# Altium PCB 7797-20-0224.PcbDoc (part 2 of 2)
Units mil, origin at the board's own origin, x right, y up, seen from the top; angles counter-clockwise.
Board outline 1500 x 3000 mil, 6 copper layers (Top Layer, GND, NS, EW, PWR, Bottom Layer), stack 48.468 mil thick; 119 components, 95 nets, 430 pads, 191 vias.
Unrouted connection lines stored in the file: 5.
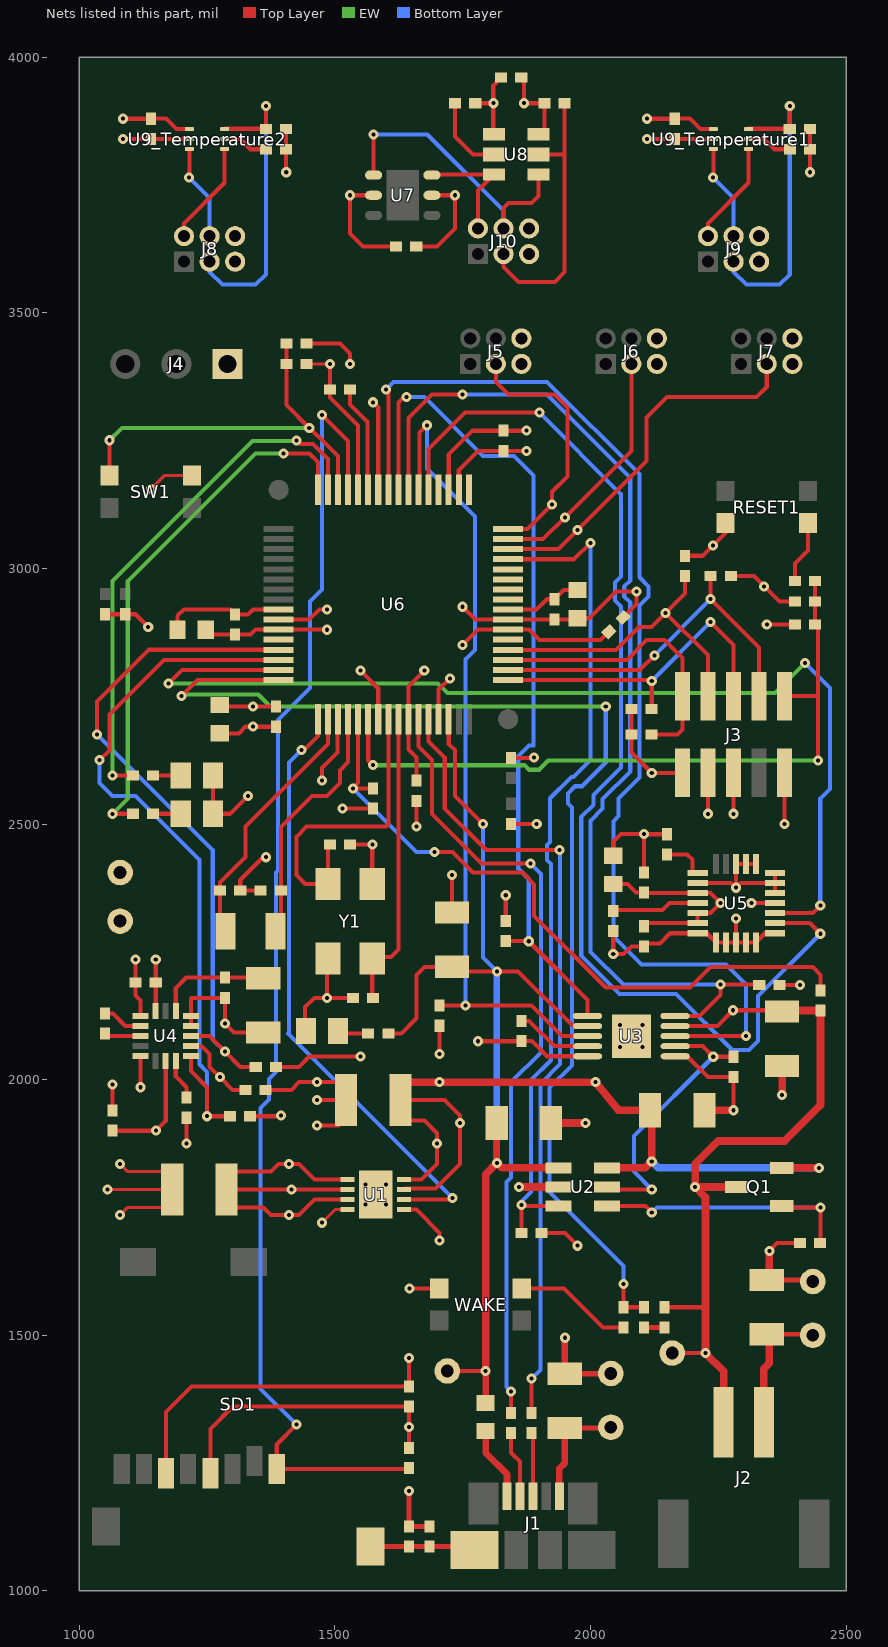
[diagram p6: the nets of this part, all layers, seen from the top]

## Via types
v1: diameter 19.68, hole 7.87, Top Layer to Bottom Layer, 191 vias

## Nets (pads, with @x,y where several pads share a name; then routed paths per layer and width w, separated by ;. In a path a pad name is that pad's centre, name@x,y a point inside that pad or via, vN(x,y) a via of type N, cw(c..) or ccw(c..) an arc to the next point about the centre after c; other vN are vias at no path point) (continued)
C4/sIO_IND1: R22.2 U6.16 | length 1044.5
  Top Layer w8: v1(1065,2520) R22.2@1105.31,2520 ; v1(1400,3225) 1450,3225 1466.89,3208.11 U6.16@1466.89,3153.82
  EW w8: v1(1065,2520) 1095,2550 1095,2975 1345,3225 v1(1400,3225)
C5/sIO_IND2: R24.2 U6.15 | length 1030.8
  Top Layer w8: v1(1065,2595) R24.2@1105.31,2595 ; v1(1425,3250) 1432,3243 1457.46,3243 1486.57,3213.88 U6.15@1486.57,3153.82
  EW w8: v1(1065,2595) 1065,2975 1338.84,3248.84 1423.84,3248.84 v1(1425,3250)
C6/sIO_SW1: C35.2 R33.1 SW1.1 U6.14 | length 798.5
  Top Layer w8: SW1.1@1059.29,3181.5 v1(1059.29,3250.71) ; R33.1@1405.31,3440 C35.2@1405.31,3400 1405.31,3319.69 v1(1450,3275) 1464,3261 1464.91,3261 1506.26,3219.65 U6.14@1506.26,3153.82
  EW w8: v1(1059.29,3250.71) 1083.58,3275 v1(1450,3275)
C7/sSD_CD: R2.1 SD1.1 U6.13 | length 2583.6
  Top Layer w8: v1(1425,1325) 1386.38,1286.38 SD1.1@1386.38,1237.95 1642.64,1237.95 R2.1@1645,1240.31 ; v1(1475,3300) 1525.94,3249.05 U6.13@1525.94,3153.82
  Bottom Layer w8: v1(1425,1325) 1355,1395 1355,1944.54 1371.16,1960.7 1371.16,2001.16 1385,2015 1385,2405 1388.84,2408.84 1388.84,2703.84 1451.16,2766.16 1451.16,2934.88 1475,2958.72 v1(1475,3300)
cGND: C1.2 J1.8 R1.2 SD1.12 | length 206.1
  Top Layer w10: SD1.12@1569.84,1086.38 1766.93,1086.38 J1.8@1773.31,1080
D0/sBMS_MODE: R9.2 U2.3 U6.61 | length 1662.8
  Top Layer w8: U6.61@1838.94,3017.99 1967.99,3017.99 v1(2000,3050) ; R9.2@1865.31,1700 1865,1700.31 v1(1865,1755) 1867.4,1752.6 U2.3@1937.76,1752.6
  Bottom Layer w8: v1(1865,1755) 1865,1761.28 1883.84,1780.12 1883.84,1998.84 1922.87,2037.87 1922.87,2422.13 1915.37,2429.63 1915.37,2458.66 1921.21,2464.5 1921.21,2550.39 1962.67,2591.84 1966.84,2591.84 2000,2625 v1(2000,3050)
D1/sTEMP_ALERT_R: J7.3 U6.62 | length 742.3
  Top Layer w8: U6.62@1838.94,3037.68 1937.68,3037.68 v1(1975,3075) 2110,3210 2110,3295 2150,3335 2325,3335 2345,3355 J7.3@2345,3400 J7.3@2345,3410
D2/sLIGHT_INT_M: J6.3 U6.63 | length 492.6
  Top Layer w8: U6.63@1838.94,3057.36 1907.36,3057.36 v1(1950,3100) 2080,3230 J6.3@2080,3400 J6.3@2080,3410
D3/sTEMP_ALERT_L: J5.3 U6.64 | length 504.1
  Top Layer w8: J5.3@1815,3400 1815,3365 1840,3340 1930,3340 1955,3315 1955,3180 1925,3150 v1(1925,3125) 1877.05,3077.05 U6.64@1838.94,3077.05
D4/sUSB_DATA_N: R3.2 U6.43 | length 1543.7
  Top Layer w8: U6.43@1663.74,2705 1663.74,2651.72 1690,2625.46 1690,2520 1787.27,2422.73 v1(1882.73,2422.73) ; R3.2@1845,1347.87 v1(1845,1390)
  Bottom Layer w8: v1(1845,1390) 1836.16,1398.84 1836.16,1799.88 1845,1808.72 1845,1995 1903.21,2053.21 1903.21,2402.24 v1(1882.73,2422.73)
D5/sUSB_DATA_P: R4.2 U6.44 | length 1570.7
  Top Layer w8: U6.44@1683.42,2705 1683.42,2661.57 1715,2630 1715,2530 1796.21,2448.79 v1(1939.21,2448.79) ; R4.2@1885,1347.87 v1(1885,1415)
  Bottom Layer w8: v1(1885,1415) 1902,1432 1902,1991.54 1940.87,2030.41 1940.87,2447.13 v1(1939.21,2448.79)
E0/sBMS_S\H\D\N\: U3.8 U6.9 | length 2253.1
  Top Layer w8: v1(1600,3350) 1604.68,3345.31 U6.9@1604.68,3153.82 ; U3.8@2165.63,2085 2303.74,2085 v1(2304.37,2085.63)
  Bottom Layer w8: v1(1600,3350) 1615,3365 1915.46,3365 2096,3184.46 2096,2982.72 2113.84,2964.88 2113.84,2945.12 2096,2927.28 2096,2591 2055,2550 2055,2515.26 2044.84,2505.1 2044.84,2280.16 2100,2225 2265,2225 2304.37,2185.63 v1(2304.37,2085.63)
E1/sBMS_C\H\R\G\: R19.2 U3.1 U6.8 | length 1669.3
  Top Layer w8: U6.8@1624.37,3153.82 1624.37,3324.37 1635,3335 v1(1640,3335) ; 1844.37,2270.94 1879.05,2270.94 v1(1879.37,2270.63) 1994.37,2155.63 U3.1@1994.37,2124.37
  Bottom Layer w8: v1(1640,3335) 1675,3335 1789.87,3220.12 1850.84,3220.12 1888.84,3182.12 1888.84,2653.84 1880.12,2653.84 1858.89,2632.6 1858.89,2412.85 1879.37,2392.37 v1(1879.37,2270.63)
E2/sBMS_A\C\P\R\: R18.2 U3.10 U6.7 | length 2112.9
  Top Layer w8: U6.7@1644.05,3153.82 1644.05,3294.05 1690,3340 v1(1750,3340) ; U3.10@2165.63,2124.37 2213.11,2124.37 2254.37,2165.63 v1(2254.37,2185.63) 2329.68,2185.63 R18.2@2330.31,2185
  Bottom Layer w8: v1(1750,3340) 1915,3340 2078,3177 2078,2976.72 2066.16,2964.88 2066.16,2945.12 2078,2933.28 2078,2603 2023.84,2548.84 2023.84,2530.12 2000,2506.28 2000,2250 2064.37,2185.63 v1(2254.37,2185.63)
E3/sBMS_\F\A\U\L\T\: R16.2 U3.3 U6.6 | length 1627.3
  Top Layer w8: U6.6@1663.74,3153.82 1665.42,3155.5 1665.42,3265.42 v1(1680,3280) ; R16.2@1705,2144.68 v1@1754.68,2144.68 ; v1(1755.94,2144.68) 1885.14,2144.68 1944.83,2085 U3.3@1994.37,2085
  Bottom Layer w8: v1(1680,3280) 1680,3195 1773.84,3101.16 1773.84,2840.12 1755.94,2822.23 v1(1755.94,2144.68)
F1/sAG_INT1: R14.2 U4.11 U6.29 | length 1337.1
  Top Layer w8: v1(1035,2675) 1035,2740 1135.83,2840.83 U6.29@1390.12,2840.83 ; U4.11@1218.42,2085.31 1254.68,2085.31 v1(1284.84,2055.16) 1315,2025 R14.2@1345.31,2025
  Bottom Layer w8: v1(1035,2675) 1261.16,2448.84 1261.16,2078.84 v1(1284.84,2055.16)
F2/sAG_INT2: R11.2 U4.9 U6.30 | length 1458.1
  Top Layer w8: v1(1040,2625) 1058.84,2643.84 1058.84,2713.84 1166.14,2821.14 U6.30@1390.12,2821.14 ; U4.9@1218.42,2045.94 1218.42,2016.57 1250,1985 v1(1250,1928.33) 1261.67,1928.33 R11.2@1295,1928.33
  Bottom Layer w8: v1(1040,2625) 1040,2580 1065,2555 1110,2555 1235,2430 1235,2030 1250,2015 v1(1250,1928.33)
F3/sGYRO_INT1: U5.3 U6.31 | length 2100.4
  Top Layer w8: v1(1175,2775) 1201.46,2801.46 U6.31@1390.12,2801.46 ; U5.3@2361.46,2325.63 2435,2325.63 v1(2449.68,2340.31)
  EW w8: v1(1175,2775) 1701.28,2775 1720.12,2756.16 2361.16,2756.16 v1(2420,2815)
  Bottom Layer w8: v1(2420,2815) 2468.84,2766.16 2468.84,2568.84 2449.68,2549.68 v1(2449.68,2340.31)
F4/sGYRO_INT2: U5.2 U6.5 | length 2283.7
  Top Layer w8: U6.5@1683.42,3153.82 1683.42,3233.42 1755,3305 v1(1900,3305) ; U5.2@2361.46,2305.94 2429.05,2305.94 v1(2449.68,2285.31)
  Bottom Layer w8: v1(1900,3305) 2060,3145 2060,2984.17 2048.16,2972.33 2048.16,2937.67 2060,2925.83 2060,2610.46 2005.84,2556.3 2005.84,2537.58 1982,2513.74 1982,2242.54 2056.91,2167.63 2167.37,2167.63 2277.46,2057.54 2310,2057.54 2328.21,2075.75 2328.21,2163.84 v1(2449.68,2285.31)
Net1_1: 1.1 R15.1 | length 62.4
  Top Layer w8: 1.1@1505,2085 1510,2090 R15.1@1565.31,2090
NetC7_1: C7.1 U4.8 | length 80.2
  Top Layer w8: U4.8@1188.9,2036.1 1188.9,2006.1 1210,1985 C7.1@1210,1964.68
NetC9_2: C9.2 U3.4 | length 149.8
  Top Layer w8: C9.2@1865,2114.68 1880.31,2114.68 1929.68,2065.31 U3.4@1994.37,2065.31
NetC11_1: C11.1 U4.2 | length 80.1
  Top Layer w8: C11.1@1050,2129.37 1065.63,2129.37 1090,2105 U4.2@1120,2105
NetC17_1: C17.1 U5.16 | length 171.5
  Top Layer w8: C17.1@2044.68,2330 2046.44,2331.76 2141.13,2331.76 2154.68,2345.31 U5.16@2209.88,2345.31
NetIND1_1: IND1.1 R22.1 | length 53.8
  Top Layer w8: R22.1@1144.68,2520 IND1.1@1198.5,2520
NetIND2_1: IND2.1 R24.1 | length 53.8
  Top Layer w8: R24.1@1144.68,2595 IND2.1@1198.5,2595
NetJ1_1: J1.1 L1.1 | length 145
  Top Layer w13: L1.1@1795,1312.44 1795,1270 1836.79,1228.21 J1.1@1836.79,1184.72
NetJ1_2: J1.2 R3.1 | length 131
  Top Layer w8: R3.1@1845,1308.5 1845,1270 1862.38,1252.62 J1.2@1862.38,1184.72
NetJ1_3: J1.3 R4.1 | length 125
  Top Layer w8: R4.1@1885,1308.5 1887.97,1305.53 J1.3@1887.97,1184.72
NetJ1_5: J1.5 RS1.2 TP1.1 | length 228.8
  Top Layer w10: RS1.2@1950,1318.35 2038.35,1318.35 TP1.1@2040,1320
  Top Layer w13: J1.5@1939.15,1184.72 1939.15,1239.15 1950,1250 RS1.2@1950,1318.35
NetJ2_1: J2.1 RS2.2 TP3.1 | length 262
  Top Layer w8: RS2.2@2350,1501.85 2433.15,1501.85 TP3.1@2435,1500
  Top Layer w15: J2.1@2339.37,1330 2339.37,1434.37 2350,1445 RS2.2@2350,1501.85
NetJ8_2: J8.2 U9_Temperature2.1 | length 203.2
  Top Layer w8: J8.2@1205,3650 1205,3675 1284.45,3754.45 U9_Temperature2.1@1284.45,3820.32
NetJ8_3: J8.3 R36_Temperature2.2 U9_Temperature2.3 | length 604.3
  Top Layer w8: U9_Temperature2.3@1284.45,3859.69 1284.76,3860 R36_Temperature2.2@1365,3860 v1(1365,3905)
  Bottom Layer w8: J8.3@1255,3600 1255,3580 1280,3555 1345,3555 1365,3575 v1(1365,3905)
NetJ8_4: J8.4 U9_Temperature2.6 | length 187.1
  Top Layer w8: v1(1215,3765) 1215.55,3765.55 U9_Temperature2.6@1215.55,3820.32
  Bottom Layer w8: v1(1215,3765) 1255,3725 J8.4@1255,3650
NetJ9_2: J9.2 U9_Temperature1.1 | length 203.2
  Top Layer w8: J9.2@2230,3650 2230,3675 2309.45,3754.45 U9_Temperature1.1@2309.45,3820.32
NetJ9_3: J9.3 R36_Temperature1.2 U9_Temperature1.3 | length 604.3
  Top Layer w8: U9_Temperature1.3@2309.45,3859.69 2309.76,3860 R36_Temperature1.2@2390,3860 v1(2390,3905)
  Bottom Layer w8: J9.3@2280,3600 2280,3580 2305,3555 2370,3555 2390,3575 v1(2390,3905)
NetJ9_4: J9.4 U9_Temperature1.6 | length 187.1
  Top Layer w8: v1(2240,3765) 2240.55,3765.55 U9_Temperature1.6@2240.55,3820.32
  Bottom Layer w8: v1(2240,3765) 2280,3725 J9.4@2280,3650
NetJ10_2: J10.2 U7.6 U8.4 | length 239.9
  Top Layer w8: U7.6@1692.09,3774.37 1695.83,3770.63 U8.4@1811.69,3770.63 1780,3738.94 J10.2@1780,3665
NetJ10_3: J10.3 R39.2 U8.6 | length 546.7
  Top Layer w8: J10.3@1830,3615 1830,3590 1859.69,3560.31 1930.31,3560.31 1949.69,3579.69 1949.69,3810 ; U8.6@1898.31,3810 1949.69,3810 ; R39.2@1949.69,3910 1949.69,3810
NetJ10_4: J10.4 U7.1 U8.5 | length 591.1
  Top Layer w8: U7.1@1575.83,3769.37 v1(1575.83,3849.17) ; J10.4@1830,3665 1830,3705 1840,3715 1885,3715 1898.31,3728.31 U8.5@1898.31,3770.63
  Bottom Layer w8: v1(1575.83,3849.17) 1680.83,3849.17 1830,3700 J10.4@1830,3665
NetQ1_1: Q1.1 R8.2 U2.4 | length 574.2
  Top Layer w8: U2.4@2032.24,1752.6 2107.4,1752.6 v1(2120,1740) ; Q1.1@2374.29,1752.6 2376.89,1750 v1(2450,1750) 2450,1680.63 R8.2@2449.37,1680
  Bottom Layer w8: v1(2120,1740) 2130,1750 v1(2450,1750)
NetR5_1: R5.1 WAKE.2 | length 231.6
  Top Layer w8: WAKE.2@1865,1591.5 WAKE.2@1865.71,1591.5 1948.5,1591.5 2024.68,1515.31 R5.1@2065,1515.31
NetR6_1: R6.1 R7.2 | length 40
  Top Layer w10: R6.1@2105,1515.31 R7.2@2145,1515.31
NetR30_1: R30.1 RESET1.1 | length 124
  Top Layer w8: R30.1@2400.31,2975 2400.31,3009.61 2425.71,3035 RESET1.1@2425.71,3088.5
NetU6_1: U6.1
NetU6_4: U6.4
NetU6_10: U6.10 | length 175.3
  Top Layer w8: v1(1575,3325) 1585,3315 U6.10@1585,3153.82
NetU6_28: U6.28
NetU6_45: U6.45 | length 89.1
  Top Layer w8: U6.45@1703.11,2705 1703.11,2763.11 v1(1725,2785)
NetU6_53: U6.53
NetU6_57: U6.57
NetU6_58: U6.58
NetU6_59: U6.59
NetU6_60: U6.60
OSC0: C22.2 U6.40 Y1.3 | length 617.7
  Top Layer w8: C22.2@1490.31,2460 1486.69,2456.38 Y1.3@1486.69,2382.83 1442.16,2382.83 1425,2400 1425,2475 1445,2495 1600,2495 1604.68,2499.68 U6.40@1604.68,2705
OSC1: C13.2 U6.41 Y1.1 | length 586.6
  Top Layer w8: C13.2@1574.68,2160 1573.31,2161.38 Y1.1@1573.31,2237.16 1576.14,2240 1610,2240 1624.37,2254.37 U6.41@1624.37,2705
sAG_SA0: R10.1 U4.7 | length 229.1
  Top Layer w8: R10.1@1065,1900 v1(1150,1900) 1169.21,1919.21 U4.7@1169.21,2036.1
sAG_SA1: R12.1 U4.10 | length 157
  Top Layer w8: U4.10@1218.42,2065.63 1219.05,2065 1240,2065 1255,2050 1255,2025 v1(1275,2005) 1300,1980 R12.1@1325.31,1980
sGND: 1.2 C1.1 C2.1 C3.1 C4.1 C5.1 C6.1 C7.2 C8.1 C9.1 C10.1 C11.2 C12.1 C13.1 C14.1 C15.1 C16.1 C17.2 C18.1 C19.1 C20.1 C21.2 C22.1 C23.2 C24.2 C25.2 C26.2 C27.2 C28.2 C29.2 C30.2 C31.2 C32.2 C33.2 C34.2 C35.1 GND.1 IND1.2 IND2.2 J3.3 J3.5 J3.9 J4.1 J5.5 J6.5 J7.5 R1.1 R8.1 R9.1 R12.2 R13.1 R20.2 R31.1 RESET1.3 RS1.1 RS2.1 SD1.6 SW1.3 TP2.1 TP4.1 U1.4 U1.5 U1.9 U2.2 U3.5 U3.6 U3.11 U4.3 U4.5 U4.12 U4.13 U4.16 U5.1 U5.5 U5.6 U5.7 U5.8 U5.9 U5.10 U5.14 U5.19 U5.20 U5.21 U5.22 U5.23 U5.24 U6.3 U6.12 U6.27 U6.35 U6.39 U6.55 WAKE.4 Y1.2 Y1.4 | length 7305.7
  Top Layer w6: v1(1055,1785) C3.1@1181.85,1785 ; v1(1080,1735) 1095,1750 1181.85,1750 C3.1@1181.85,1785 ; v1(1080,1835) 1095,1820 1181.85,1820 C3.1@1181.85,1785 ; v1(1140,3155) 1166.5,3181.5 SW1.3@1220.71,3181.5 ; C35.1@1444.68,3400 1445,3399.68 v1(1490.31,3399.68) ; v1(1475,1720) 1500.47,1745.47 U1.4@1524.88,1745.47
  Top Layer w8: C11.2@1050,2090 1054.68,2085.31 U4.3@1120,2085.31 ; v1(1120,1985) U4.5@1120,2045.94 ; U4.16@1149.53,2134.53 1149.68,2134.68 C14.1@1149.68,2190 v1(1149.68,2234.68) ; SD1.6@1169.84,1230.08 1169.84,1349.84 1219.68,1399.68 C2.1@1645,1399.68 v1(1645,1455) ; v1(1210,1875) C7.2@1210,1925.31 ; U4.12@1218.42,2105 U4.13@1218.42,2124.68 1218.42,2158.42 1220,2160 C12.1@1285,2160 v1(1285,2110) 1303.15,2091.85 C10.1@1360,2091.85 ; C29.2@1247.56,2875 1252.24,2870.31 C27.2@1305,2870.31 1335.31,2870.31 1345.2,2880.2 U6.27@1390.12,2880.2 1490.2,2880.2 1490,2880 v1(1485,2880) ; IND2.2@1261.5,2595 IND1.2@1261.5,2520 1295,2520 v1(1330,2555) ; C25.2@1275,2732.56 1277.87,2729.68 v1(1340.31,2729.68) C26.2@1385,2729.68 ; C20.1@1355,2370 C19.1@1315,2370 1315,2390 1360,2435 v1(1365,2435) ; R12.2@1364.68,1980 1415,1980 1430,1995 v1(1465,1995) 1519.35,1995 1521.85,1997.5 C6.1@1521.85,1960 ; 1.2@1442.01,2085 1442.01,2142.01 1460,2160 v1(1485,2160) ; v1(1465,1910) 1506.85,1910 1521.85,1925 C6.1@1521.85,1960 ; v1(1465,1960) C6.1@1521.85,1960 ; v1(1475,2585) 1475,2610 1505.16,2640.16 1505.16,2703.9 U6.35@1506.26,2705 ; Y1.4@1486.69,2237.16 1485,2235.47 v1(1485,2160) ; v1(1490.31,3399.68) C34.2@1490.31,3350 1490.31,3334.68 1545.63,3279.37 U6.12@1545.63,3153.82 ; v1(1515,2530) 1515.31,2530.31 C23.2@1575,2530.31 ; C22.1@1529.68,2460 v1(1573.31,2460) Y1.2@1573.31,2382.83 ; C13.1@1535.31,2160 v1(1485,2160) ; v1(1550,2800) 1585,2765 U6.39@1585,2705 U6.39@1586.68,2703.31 ; U1.5@1635.12,1745.47 1659.53,1745.47 1705,1700 v1(1705,1685) ; v1(1646.5,1591.5) WAKE.4@1704.29,1591.5 ; v1(1660,2495) C24.2@1660,2545.31 ; U6.3@1722.79,3153.82 1722.79,3222.79 1769.37,3269.37 C33.2@1830,3269.37 v1(1874.68,3269.37) ; C15.1@1729.37,2326.93 v1(1729.37,2400.63) ; v1(1750,2925) 1775.12,2899.88 U6.55@1838.94,2899.88 1929.57,2899.88 C32.2@1930,2900.31 1972.87,2900.31 C31.2@1975,2902.44 1997.44,2902.44 2050,2955 v1(2090,2955) 2090,2930 C28.2@2063.92,2903.92 ; v1(1780,2075) 1864.68,2075 C9.1@1865,2075.31 1885.31,2075.31 1915,2045.63 U3.5@1994.37,2045.63 ; R9.1@1904.68,1700 1950,1700 v1(1975,1675) ; C31.2@1967.87,2910.31 C31.2@1970,2912.44 ; C17.2@2044.68,2290.63 v1(2044.68,2245.31) 2064.68,2245.31 2080,2260.63 C16.1@2104.68,2260.63 ; C21.2@2044.68,2437.87 2044.68,2465.31 2059.68,2480.31 v1(2104.68,2480.31) ; C18.1@2104.68,2410 2104.68,2470.31 ; C16.1@2105.31,2266.57 2135.94,2266.57 2155.63,2286.26 U5.19@2209.88,2286.26 2227.6,2286.26 U5.20@2245.31,2268.54 U5.21@2265,2268.54 U5.22@2284.68,2268.54 ; v1@2114.37,2480 R20.2@2149.68,2480 ; U3.6@2165.63,2045.63 2189.37,2045.63 2229.68,2005.31 R13.1@2280,2005.31 v1(2280,1940) ; R31.1@2185,3024.68 2219.68,3024.68 v1(2240,3045) 2264.29,3069.29 RESET1.3@2264.29,3088.5 ; U5.14@2209.88,2384.68 2275.31,2384.68 v1(2284.68,2375.31) ; v1(2230,2520) J3.3@2230,2600 ; v1(2280,2520) J3.5@2280,2600 ; v1(2284.68,2315.31) U5.22@2284.68,2268.54 ; U5.8@2324.05,2422.09 U5.9@2304.37,2422.09 U5.10@2284.68,2422.09 v1(2284.68,2375.31) ; v1(2345,2890) C30.2@2400.31,2890 ; v1(2350,1665) 2365,1680 R8.1@2410,1680 ; U5.1@2361.46,2286.26 2341.77,2286.26 U5.24@2324.05,2268.54 U5.23@2304.37,2268.54 U5.22@2284.68,2268.54 ; U5.5@2361.46,2365 U5.6@2361.46,2384.68 ; U5.7@2361.46,2404.37 U5.6@2361.46,2384.68 ; v1(2380,2500) J3.9@2380,2600 ; v1(2284.68,2375.31) 2294.05,2384.68 U5.6@2361.46,2384.68
  Top Layer w10: v1(1645,1195) C1.1@1645,1126.06 R1.1@1685,1126.06 ; RS1.1@1950,1424.65 2039.65,1424.65 TP2.1@2040,1425 ; RS2.1@2350,1608.15 2431.85,1608.15 TP4.1@2435,1605
  Top Layer w13: RS1.1@1950,1424.65 v1(1950,1495)
  Top Layer w15: v1(1860,1790) U2.2@1937.76,1790 ; C4.1@1923.15,1915 v1(1990,1915) ; C5.1@2223.15,1940 v1(2280,1940) ; RS2.1@2350,1608.15 v1(2350,1665) ; v1(2375,1970) C8.1@2375,2026.85
  other v1: 1560.31,1755.31 1599.68,1755.31 1560.31,1794.68 1599.68,1794.68 2058.35,2063.35 2101.65,2063.35 2058.35,2106.65 2101.65,2106.65
sGYRO_SA0: R20.1 U5.13 | length 79.3
  Top Layer w8: R20.1@2149.68,2440.63 2189.37,2440.63 2199.68,2430.31 U5.13@2199.68,2405.31
sH\I\B\: U1.6 U6.33 | length 1200.6
  Top Layer w8: v1(1435,2645) 1435,2640 1466.89,2671.89 U6.33@1466.89,2705 ; U1.6@1635.12,1765.16 1726.44,1765.16 v1(1730,1768.72)
  Bottom Layer w8: v1(1435,2645) 1410,2620 1410,2090 1408.72,2090 v1(1730,1768.72)
sHUMID_3V3: C36.2 C39.2 J10.6 R39.1 U7.5 U8.1 | length 352.4
  Top Layer w8: C36.2@1659.37,3630 1700,3630 1735,3665 1735,3720 1725,3730 U7.5@1690,3730 ; C39.2@1864.69,3960 1870,3954.69 v1(1870,3910) R39.1@1910.32,3910 1910.32,3861.38 U8.1@1898.31,3849.37
  other v1: 1735,3730
sHUMID_GND: C36.1 C39.1 J10.5 R38.2 U7.2 U8.2 | length 376.9
  Top Layer w8: U7.2@1575.83,3730 v1(1530,3730) 1530,3655 1555,3630 C36.1@1620,3630 ; R38.2@1774.69,3910 v1(1810,3910) ; U8.2@1811.69,3849.37 1815,3852.68 1810,3857.68 v1(1810,3910) ; C39.1@1825.32,3960 1810,3944.68 v1(1810,3910)
sLIGHT_ADDR: R38.1 U8.3 | length 156.1
  Top Layer w8: R38.1@1735.32,3910 1735.32,3844.68 1770,3810 U8.3@1811.69,3810
sPM_MODE/sBMS_PROG: R13.2 U2.5 U3.7 | length 551.3
  Top Layer w8: U2.5@2032.24,1790 2037.24,1785 v1(2120,1785) ; U3.7@2165.63,2065.31 2219.68,2065.31 v1(2240.31,2044.68) R13.2@2280,2044.68
  Bottom Layer w8: v1(2120,1785) 2085,1820 2085,1889.37 v1(2240.31,2044.68)
sPWR_3V3: C2.2 C3.2 C10.2 C12.2 C14.2 C16.2 C18.2 C21.1 C24.1 C25.1 C26.1 C28.1 C33.1 C34.1 J3.1 J5.6 J6.6 J7.6 LDO.1 R2.2 R10.2 R11.1 R14.1 R16.1 R18.1 R19.1 R21.2 R23.2 R25.1 R26.1 R27.2 R28.2 R29.2 R32.1 R33.2 SD1.4 U1.1 U1.2 U1.3 U4.1 U4.14 U5.4 U5.15 U5.17 U5.18 U6.2 U6.11 U6.26 U6.42 U6.54 | length 4411.6
  Top Layer w8: R27.2@1050,2910.31 R28.2@1090,2910.31 1109.68,2910.31 v1(1135,2885) ; R10.2@1065,1939.37 v1(1065,1990) ; v1(1110,2235) 1110.31,2234.68 C14.2@1110.31,2190 1110.31,2164.68 1120,2155 U4.1@1120,2124.68 ; U4.14@1188.9,2134.53 1188.9,2178.9 1209.37,2199.37 C12.2@1285,2199.37 1358.78,2199.37 C10.2@1360,2198.15 ; SD1.4@1256.46,1230.08 1256.46,1316.46 1300.31,1360.31 C2.2@1645,1360.31 v1(1645,1320) R2.2@1645,1279.68 ; C25.1@1275,2677.44 1312.44,2677.44 1325.31,2690.31 v1(1340.31,2690.31) C26.1@1385,2690.31 ; 1310.16,1784.84 v1(1415,1784.84) U1.2@1524.88,1784.84 ; R11.1@1334.37,1928.33 1393.33,1928.33 v1(1395,1930) ; R14.1@1384.68,2025 1430,2025 1450,2045 v1(1550,2045) ; U6.26@1390.12,2899.88 1449.88,2899.88 1470,2920 v1(1485,2920) ; R33.2@1444.68,3440 1510,3440 1530,3420 v1(1530,3400) ; U1.3@1524.88,1765.16 1460.16,1765.16 1430,1735 v1(1410,1735) 1375,1735 1360,1750 1288.31,1750 1288.31,1784.84 C3.2@1288.15,1785 1288.15,1820 1375,1820 1390,1835 v1(1410,1835) 1430,1835 1460.47,1804.53 U1.1@1524.88,1804.53 ; C34.1@1529.68,3350 1529.68,3320.77 1563.63,3286.83 1563.63,3155.5 U6.11@1565.31,3153.82 ; C24.1@1660,2584.68 1660,2630 1644.05,2645.94 U6.42@1644.05,2705 1644.05,2769.05 v1(1675,2800) ; v1(1705,2050) R16.1@1705,2105.31 ; U6.2@1742.48,3153.82 1742.48,3192.48 1780,3230 C33.1@1830,3230 v1(1874.68,3230) ; v1(1750,2850) 1780.2,2880.2 U6.54@1838.94,2880.2 1879.8,2880.2 1900,2860 2020,2860 C28.1@2036.08,2876.08 ; R19.1@1834.37,2310.31 v1(1834.37,2360.63) ; R21.2@1845,2500.31 1894.68,2500.31 v1(1895,2500) ; R23.2@1845,2629.37 1889.37,2629.37 v1(1890,2630) ; C21.1@2044.68,2382.76 2072.24,2382.76 2089.37,2365.63 C18.2@2104.68,2365.63 2105.31,2365 U5.15@2209.88,2365 2235,2365 v1(2254.68,2345.31) 2235,2325.63 U5.17@2209.88,2325.63 U5.18@2209.88,2305.94 C16.2@2105.31,2305.94 ; R26.1@2080.31,2725 2080,2724.68 R25.1@2080,2675 2080,2640 v1(2120,2600) J3.1@2180,2600 ; C18.2@2104.68,2370.63 C18.2@2108.63,2366.68 ; R32.1@2274.68,2985 2320,2985 2370,2935 R29.2@2400.31,2935 ; v1(2314.68,2345.31) U5.4@2361.46,2345.31 ; R18.1@2369.68,2185 v1(2410,2185)
  other v1: 2340,2965
sPWR_3V7: BAT.1 C8.2 J2.2 Q1.3 R7.1 R17.2 U3.9 | length 1524.1
  Top Layer w8: R7.1@2145,1554.68 2224.68,1554.68 2225,1555 ; BAT.1@2165,1465 v1(2225,1465) ; U3.9@2165.63,2104.68 2248.42,2104.68 v1(2279.37,2135.63) 2373.78,2135.63 C8.2@2374.09,2135.31
  Top Layer w15: J2.2@2260.63,1330 2260.63,1429.37 v1(2225,1465) 2225,1555 2225,1770 v1(2205,1790) ; Q1.3@2285.71,1790 v1(2205,1790) ; C8.2@2374.09,2135.31 R17.2@2450,2135.31 2450,1950 2380,1880 2250,1880 2205,1835 v1(2205,1790)
sPWR_5V0: C4.2 C15.2 L1.2 R15.2 U2.1 U3.2 U6.46 USB.1 | length 2192.7
  Top Layer w8: R15.2@1604.68,2090 1630,2090 1660,2120 1660,2205 1675.63,2220.63 C15.2@1729.37,2220.63 ; USB.1@1720,1430 v1(1795,1430) ; U6.46@1722.79,2705 1722.79,2656.75 1735,2644.54 1735,2555 v1(1790,2500) ; C15.2@1744.37,2220.63 1753.15,2211.85 v1(1816.85,2211.85) 1858.6,2211.85 1965.77,2104.68 U3.2@1994.37,2104.68
  Top Layer w13: L1.2@1795,1367.56 v1(1795,1430) ; v1(1816.85,1836.85) C4.2@1816.85,1915
  Top Layer w15: v1(1795,1430) 1795,1815 v1(1816.85,1836.85) 1826.3,1827.4 U2.1@1937.76,1827.4
  Bottom Layer w8: v1(1790,2500) 1790,2238.7 v1(1816.85,2211.85)
  Bottom Layer w13: v1(1816.85,2211.85) v1(1816.85,1836.85) v1@1819.53,1836.85
sR\E\S\E\T\: C30.1 J3.10 R29.1 R30.2 U6.38 | length 1393.4
  Top Layer w8: U6.38@1565.31,2705 1565.31,2624.68 v1(1575,2615) ; J3.10@2380,2750 2445,2750 ; R30.2@2439.68,2975 R29.1@2439.68,2935 C30.1@2439.68,2890 2445,2884.69 2445,2750 ; v1(2445,2623.84) 2445,2750
  EW w8: v1(1575,2615) 1871.28,2615 1880.12,2606.16 1899.88,2606.16 1917.56,2623.84 v1(2445,2623.84)
sTEMP_3V3_Temperature1: C37_Temperature1.2 J9.6 R34_Temperature1.2 R36_Temperature1.1 U9_Temperature1.5 | length 215.6
  Top Layer w8: v1(2110.32,3840.32) R34_Temperature1.2@2165,3840.32 2165.32,3840 U9_Temperature1.5@2240.55,3840 ; R36_Temperature1.1@2429.37,3860 2429.37,3820.31 C37_Temperature1.2@2429.68,3820 2429.68,3775.32 v1(2430,3775)
sTEMP_3V3_Temperature2: C37_Temperature2.2 J8.6 R34_Temperature2.2 R36_Temperature2.1 U9_Temperature2.5 | length 215.6
  Top Layer w8: v1(1085.32,3840.32) R34_Temperature2.2@1140,3840.32 1140.32,3840 U9_Temperature2.5@1215.55,3840 ; R36_Temperature2.1@1404.37,3860 1404.37,3820.31 C37_Temperature2.2@1404.68,3820 1404.68,3775.32 v1(1405,3775)
sTEMP_ADD0_Temperature1: R34_Temperature1.1 U9_Temperature1.4 | length 138.8
  Top Layer w8: v1(2110.31,3879.69) R34_Temperature1.1@2165,3879.69 2165.31,3880 2195,3880 2215.31,3859.69 U9_Temperature1.4@2240.55,3859.69
sTEMP_ADD0_Temperature2: R34_Temperature2.1 U9_Temperature2.4 | length 138.8
  Top Layer w8: v1(1085.31,3879.69) R34_Temperature2.1@1140,3879.69 1140.31,3880 1170,3880 1190.31,3859.69 U9_Temperature2.4@1215.55,3859.69
sTEMP_GND_Temperature1: C37_Temperature1.1 J9.5 U9_Temperature1.2 | length 89.1
  Top Layer w8: U9_Temperature1.2@2309.45,3840 2340,3840 2360,3820 C37_Temperature1.1@2390.31,3820
sTEMP_GND_Temperature2: C37_Temperature2.1 J8.5 U9_Temperature2.2 | length 89.1
  Top Layer w8: U9_Temperature2.2@1284.45,3840 1315,3840 1335,3820 C37_Temperature2.1@1365.31,3820
sUNREG: C5.2 C6.2 Q1.2 U1.7 U1.8 U2.6 | length 1708.5
  Top Layer w8: C6.2@1620,1950 C6.2@1638.15,1950 ; C6.2@1628.15,1960 C6.2@1638.15,1950 ; U1.7@1635.12,1784.84 1636.99,1786.72 1696.72,1786.72 1745,1835 v1(1745,1915) 1745,1930 1715,1960 1648.15,1960 C6.2@1638.15,1950 ; U1.8@1635.12,1804.53 1669.53,1804.53 1700,1835 v1(1700,1875) 1700,1895 1675,1920 C6.2@1640,1920
  Top Layer w15: C6.2@1628.15,1960 1628.15,1995 v1(1705,1995) v1(2010,1995) 2055,1940 C5.2@2116.85,1940 ; U2.6@2032.24,1827.4 2107.4,1827.4 v1(2120,1840) 2120,1908.15 C5.2@2121.85,1910 ; Q1.2@2374.29,1827.4 v1(2447.4,1827.4)
  Bottom Layer w15: v1(2120,1840) 2132.6,1827.4 v1(2447.4,1827.4)
sVBAT: C23.1 R17.1 U6.37 | length 1350.1
  Top Layer w8: U6.37@1545.63,2705 1545.63,2580 v1(1535.31,2569.68) C23.1@1575,2569.68 ; v1(1695,2445) 1730,2445 1770.27,2404.73 1867.01,2404.73 1890,2381.74 1890,2320 2030,2180 2195,2180 2235,2220 2435,2220 2450,2205 R17.1@2450,2174.68
  Bottom Layer w8: v1(1535.31,2569.68) 1660,2445 v1(1695,2445) v1@1698.84,2448.84
sVDDC: C27.1 C29.1 C31.1 C32.1 U6.25 U6.56 | length 395.5
  Top Layer w8: C29.1@1192.44,2875 C29.1@1192.44,2880 1192.44,2907.44 1205,2920 1294.68,2920 C27.1@1305,2909.68 1330.55,2909.68 1340.43,2919.57 U6.25@1390.12,2919.57 ; U6.56@1838.94,2919.57 1894.57,2919.57 1914.68,2939.68 C32.1@1930,2939.68 1947.87,2957.56 C31.1@1975,2957.56
sW\A\K\E\: R5.2 R6.2 U6.32 | length 2379.8
  Top Layer w8: v1(1200,2750) 1231.77,2781.77 U6.32@1390.12,2781.77 ; v1(2065,1600) R5.2@2065,1554.68 R6.2@2105,1554.68
  EW w8: v1(1200,2750) 1203.53,2753.53 1350.19,2753.53 1373.72,2730 v1(2030,2730)
  Bottom Layer w8: v1(2030,2730) 2030,2620 1983.84,2573.84 1970.12,2573.84 1956.16,2559.88 1956.16,2540.12 1963.84,2532.44 1963.84,2027.93 1920,1984.09 1920,1780 2065,1635 v1(2065,1600)
TCK: J3.4 R31.2 U6.52 | length 624.2
  Top Layer w8: U6.52@1838.94,2840.83 1839.76,2840 2050,2840 2095,2885 2119.16,2885 v1(2147.31,2913.15) ; R31.2@2185,2985.31 2185,2950.84 v1(2147.31,2913.15) ; J3.4@2230,2750 2230,2830.46 v1(2147.31,2913.15)
TDI: J3.8 R32.2 U6.50 | length 727.3
  Top Layer w8: U6.50@1838.94,2801.46 2096.46,2801.46 v1(2125,2830) ; v1@2234.68,2940.31 v1(2235,2940) 2330,2845 J3.8@2330,2750 ; v1@2235.31,2940.94 R32.2@2235.31,2985
  Bottom Layer w8: v1(2125,2830) v1(2235,2940)
TDO: J3.6 R26.2 U6.49 | length 663.2
  Top Layer w8: U6.49@1838.94,2781.77 2118.23,2781.77 v1(2120,2780) 2120,2725.31 R26.2@2119.68,2725 ; v1(2235,2895) 2280,2850 J3.6@2280,2750
  Bottom Layer w8: v1(2120,2780) v1(2235,2895)
TMS: J3.2 R25.2 U6.51 | length 576.4
  Top Layer w8: U6.51@1838.94,2821.14 2071.14,2821.14 2110,2860 2145,2860 2180,2825 J3.2@2180,2750 2180,2685 2170,2675 R25.2@2119.37,2675
XOSC0: C19.2 U6.34 Y2.1 | length 506.6
  Top Layer w8: Y2.1@1285.79,2290 1275.63,2300.16 C19.2@1275.63,2370 1275.63,2385.63 1325,2435 1325,2495 1486.57,2656.57 U6.34@1486.57,2705
XOSC1: C20.2 U6.36 Y2.2 | length 491.3
  Top Layer w8: Y2.2@1384.21,2290 1394.37,2300.16 C20.2@1394.37,2370 1394.37,2494.37 1455,2555 1485,2555 1510,2580 1510,2605 1525.94,2620.94 U6.36@1525.94,2705
pads on no net: J1.4 J1.6 J1.7 J1.9 J1.10 J1.11 J2.0 J3.7 J5.1 J6.1 J7.1 J8.1 J9.1 J10.1 RESET1.2 RESET1.4 SD1.8 SD1.9 SD1.10 SD1.11 SW1.2 SW1.4 U4.15 U6.65 U6.66 U7.3 U7.4 U7.7 WAKE.1 WAKE.3
copper on no net:
  other v1: 1613.23,3690.63 1652.6,3690.63 1613.23,3730 1652.6,3730 1613.23,3769.37 1652.6,3769.37

## Polygon pours and split planes (outlines as drawn)
sHUMID_GND on GND (split plane): 1979.9,3545.1 1520.1,3545.1 1520.1,3979.9 1979.9,3979.9
sTEMP_GND_Temperature1 on GND (split plane): 2479.9,3545.1 2045.1,3545.1 2045.1,3979.9 2479.9,3979.9
sTEMP_GND_Temperature2 on GND (split plane): 1454.9,3545.1 1020.1,3545.1 1020.1,3979.9 1454.9,3979.9
sGND on GND (split plane): 2479.9,1020.1 1020.1,1020.1 1020.1,3479.9 2479.9,3479.9
sHUMID_3V3 on PWR (split plane): 1979.9,3545.1 1520.1,3545.1 1520.1,3979.9 1979.9,3979.9
sTEMP_3V3_Temperature1 on PWR (split plane): 2479.9,3545.1 2045.1,3545.1 2045.1,3979.9 2479.9,3979.9
sTEMP_3V3_Temperature2 on PWR (split plane): 1454.9,3545.1 1020.1,3545.1 1020.1,3979.9 1454.9,3979.9
sPWR_3V3 on PWR (split plane): 2479.9,1020.1 1020.1,1020.1 1020.1,3479.9 2479.9,3479.9

## Other copper
GND (plane layer: these items are gaps in the copper):
  lines w4: 1500,3525 1500,4000

## Silkscreen, mask and mechanical layers (free items; w line width, h text height)
Mechanical 1:
  the board outline again, w10

## Text inside footprints (layer, text, board x,y; h text height)
J1: Mechanical 6 "PCB EDGE" at 1604.51,1018.7 h11.81
J2: Top Overlay "+-" at 2247.2,1421.5 h60
J5: Top Overlay "1" at 1702.01,3380 h39.37; Top Overlay "5" at 1914.61,3380 h39.37
J6: Top Overlay "1" at 1967.01,3380 h39.37; Top Overlay "5" at 2179.61,3380 h39.37
J7: Top Overlay "1" at 2232.01,3380 h39.37; Top Overlay "5" at 2444.61,3380 h39.37
J8: Top Overlay "1" at 1142.01,3580 h39.37; Top Overlay "5" at 1354.61,3580 h39.37
J9: Top Overlay "1" at 2167.01,3580 h39.37; Top Overlay "5" at 2379.61,3580 h39.37
J10: Top Overlay "1" at 1717.01,3595 h39.37; Top Overlay "5" at 1929.61,3595 h39.37